# Altium PCB Flyback.PcbDoc
Units mil, origin at the board's own origin, x right, y up, seen from the top; angles counter-clockwise.
Board outline 7610 x 6110 mil, 2 copper layers (Top Layer, Bottom Layer); 216 components, 145 nets, 608 pads, 2 vias.
Unrouted connection lines stored in the file: 346.
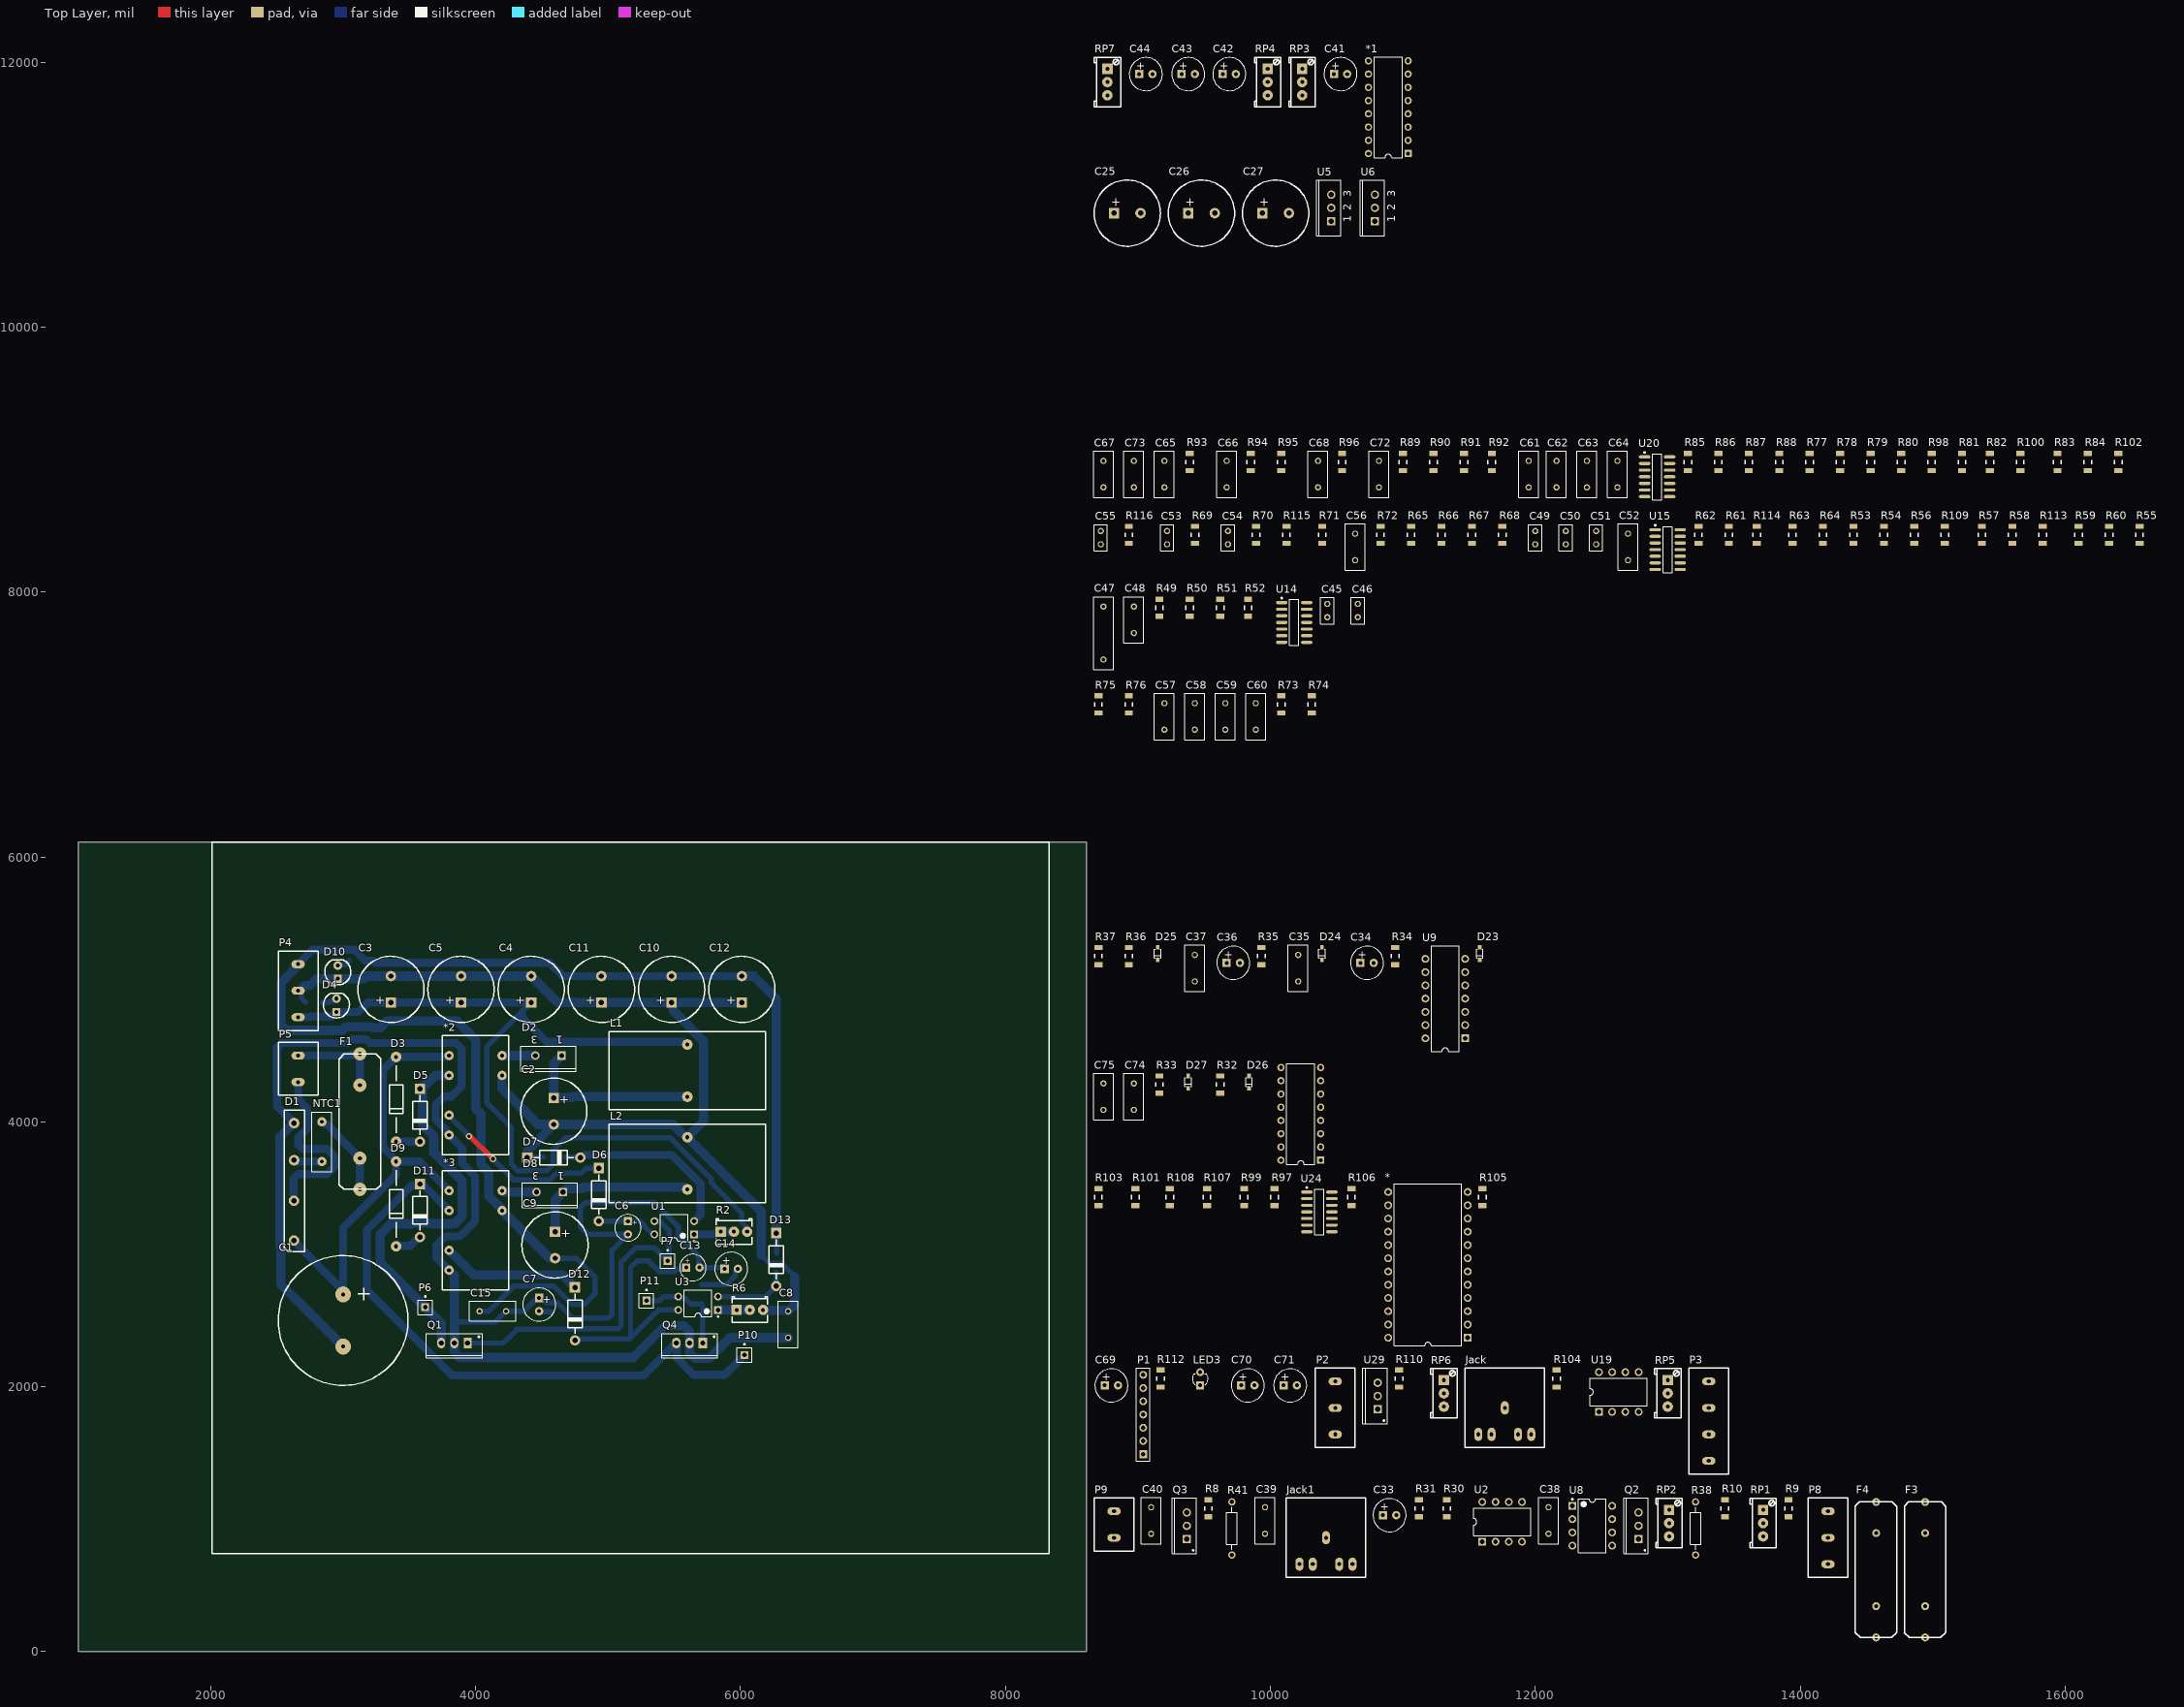
[diagram p0: Top Layer view]
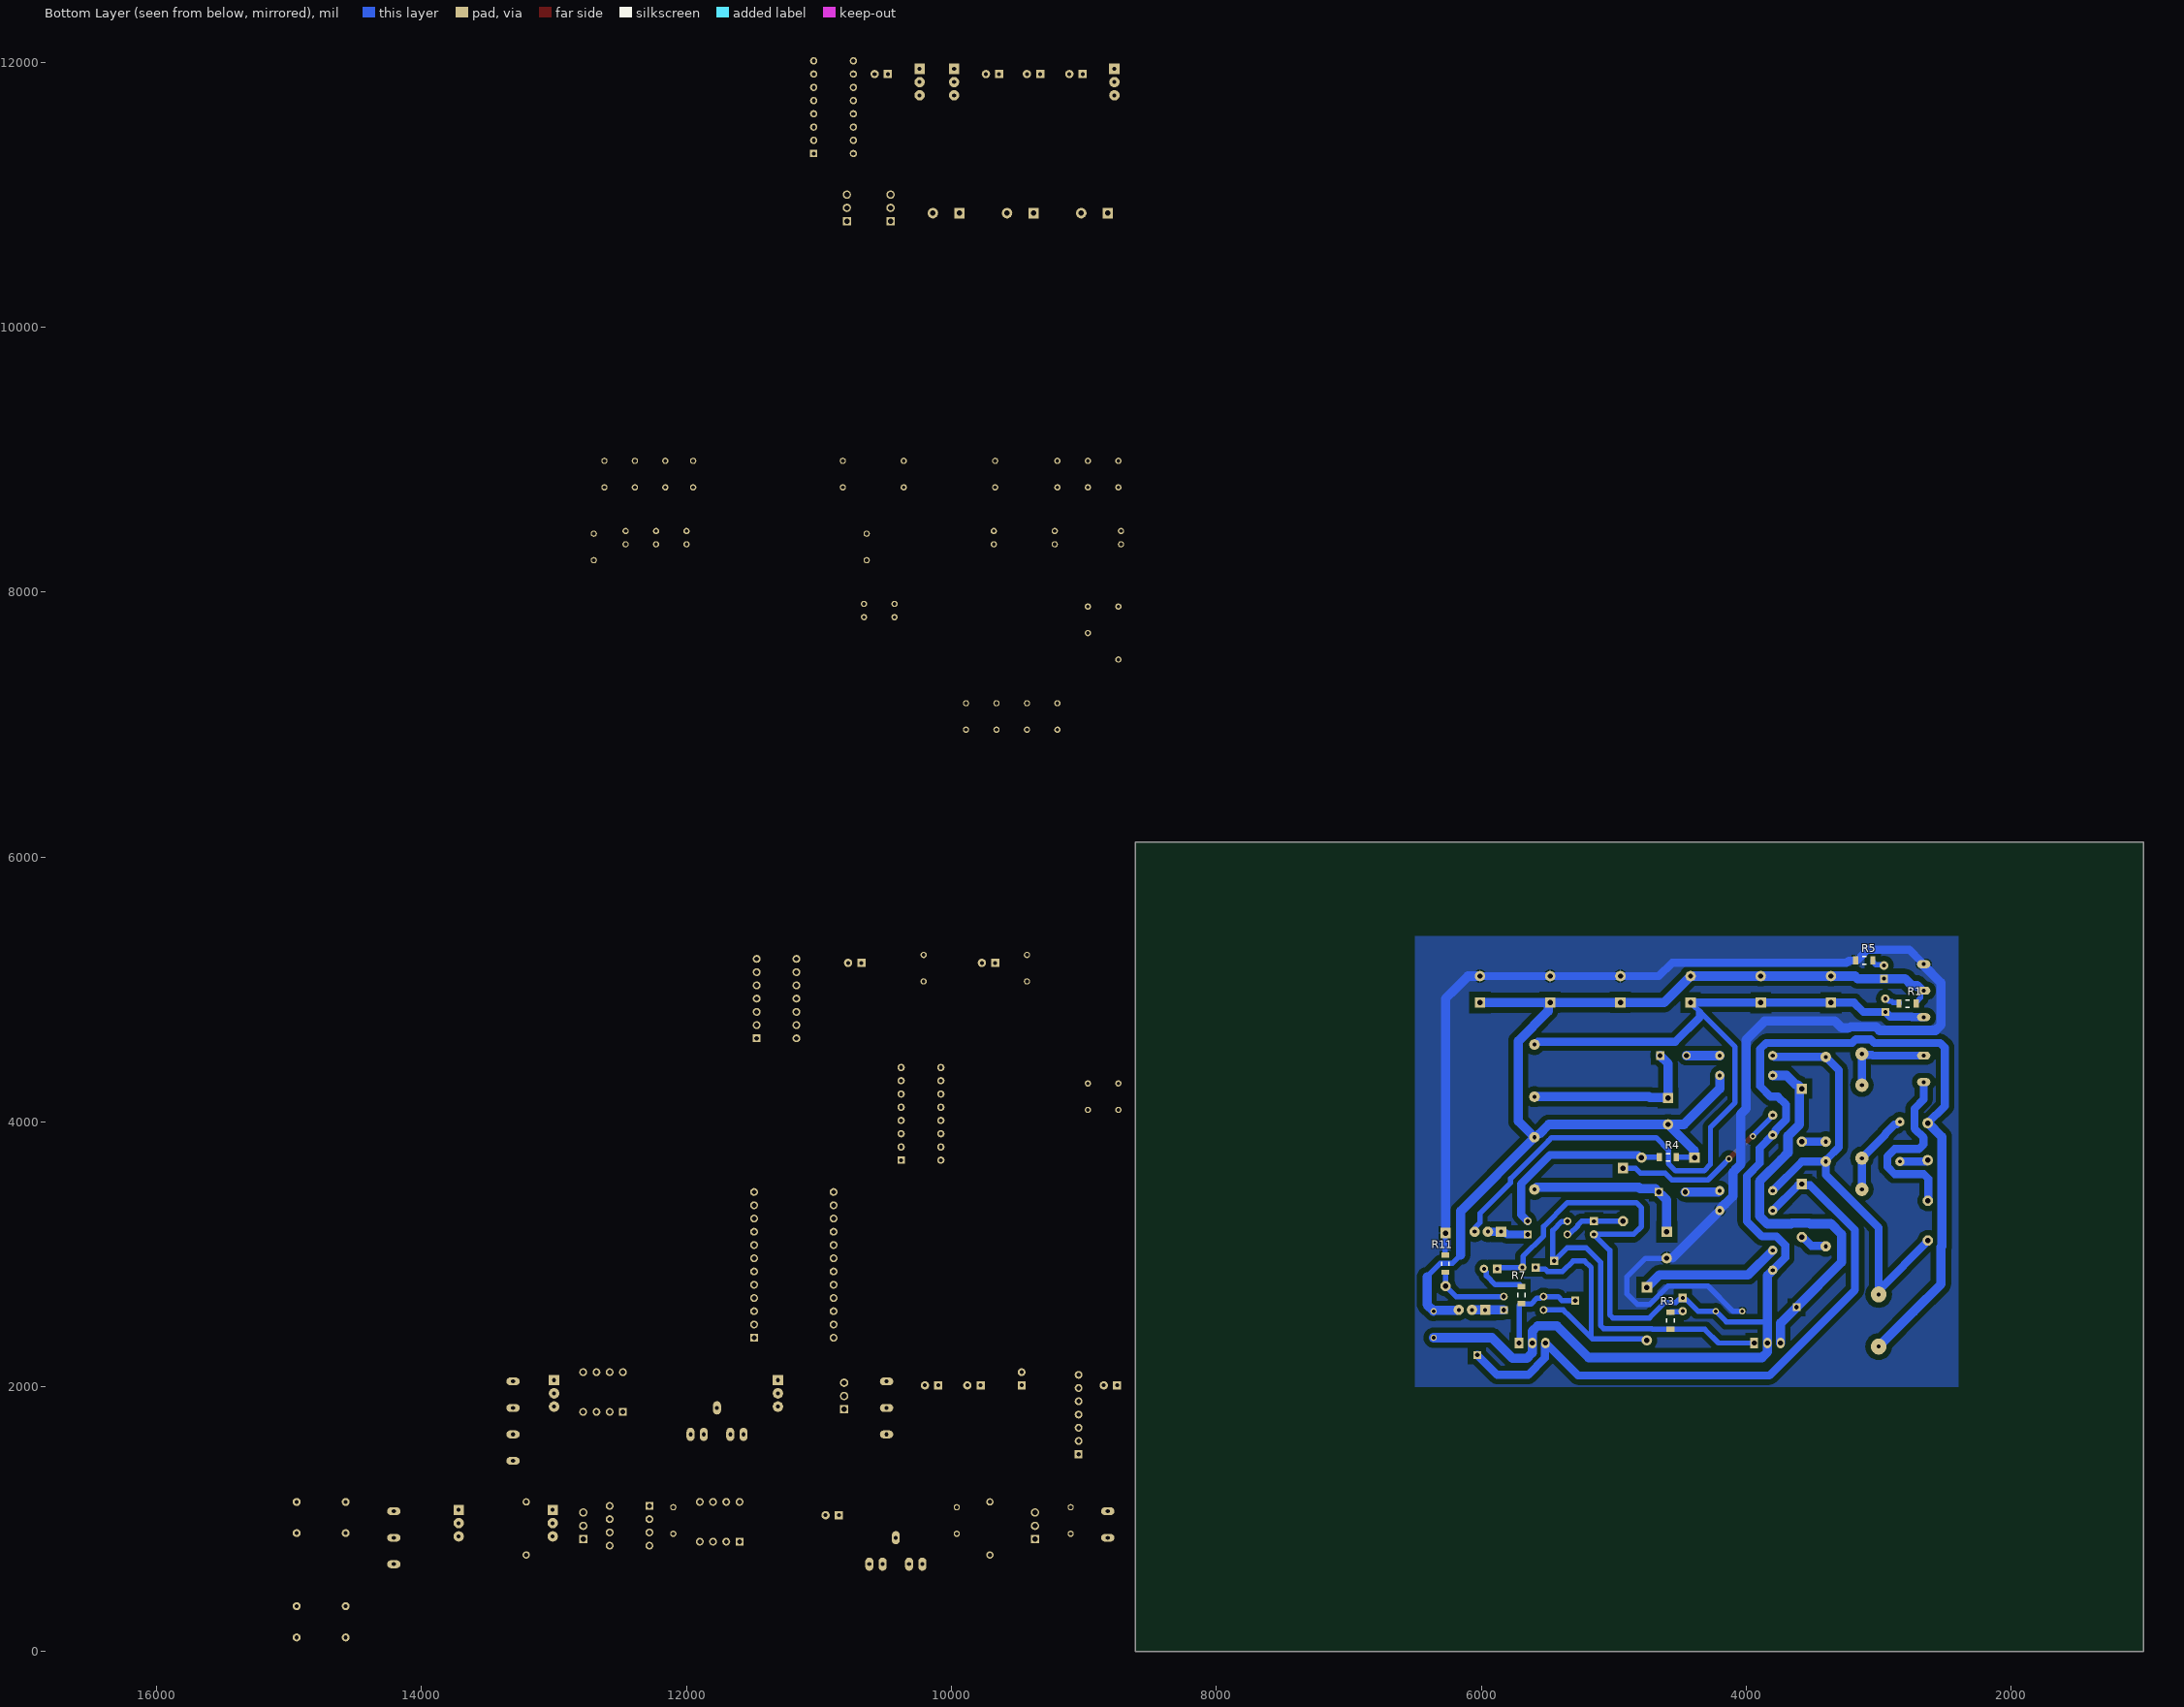
[diagram p1: Bottom Layer view, seen from below]

## Layer stack, top to bottom
Top Solder: solder mask 0.4, Solder Resist, Dk 3.5
Top Layer: signal copper 1.4
Dielectric 1: dielectric 12.6, FR-4, Dk 4.8
Bottom Layer: signal copper 1.4
Bottom Solder: solder mask 0.4, Solder Resist, Dk 3.5

## Board outline
1000,0 8610,0 8610,6110 1000,6110

## Design rules (kind name [scope] priority, off if disabled: settings)
Clearance [All] p1: gap=40 ignorepadtopadclearanceinfootprint=FALSE except(0: Arc-Hole Track-Hole SMDPad-Hole THPad-Hole Via-Hole Fill-Hole Poly-Hole Region-Hole Text-Hole; 10: Arc-Text Track-Text SMDPad-SMDPad SMDPad-THPad SMDPad-Via SMDPad-Text THPad-THPad THPad-Via THPad-Text Via-Via Via-Text Fill-Text Poly-Text Region-Text Text-Text; 20: Arc-SMDPad Track-SMDPad; 30: Arc-Arc Arc-Track Arc-THPad Arc-Via Track-Track Track-THPad Track-Via)
PolygonConnect [All] p1: connectstyle=Relief reliefconductorwidth=10 reliefentries=4 polygonreliefangle="90 Angle" airgapwidth=10
RoomDefinition Triangular [InComponentClass('Triangular')] p1: confinementstyle=ConfineIn formatcopy=TRUE lockcomponents=FALSE outline 8650,11270 11080,11270 11080,12150 8650,12150
RoomDefinition "Step Down" [InComponentClass('Step Down')] p2: confinementstyle=ConfineIn formatcopy=TRUE lockcomponents=FALSE outline 8650,10590 10960,10590 10960,11230 8650,11230
RoomDefinition "Pasa Banda Superior" [InComponentClass('Pasa Banda Superior')] p3: confinementstyle=ConfineIn formatcopy=TRUE lockcomponents=FALSE outline 8650,8670 16610,8670 16610,9180 8650,9180
RoomDefinition "Pasa Banda Inferior" [InComponentClass('Pasa Banda Inferior')] p4: confinementstyle=ConfineIn formatcopy=TRUE lockcomponents=FALSE outline 8660,8120 16720,8120 16720,8630 8660,8630
RoomDefinition "Pasa Bajos" [InComponentClass('Pasa Bajos')] p5: confinementstyle=ConfineIn formatcopy=TRUE lockcomponents=FALSE outline 8650,7400 10800,7400 10800,8080 8650,8080
RoomDefinition "Pasa Altos" [InComponentClass('Pasa Altos')] p6: confinementstyle=ConfineIn formatcopy=TRUE lockcomponents=FALSE outline 8660,6870 10470,6870 10470,7350 8660,7350
RoomDefinition "Mosfet Driver" [InComponentClass('Mosfet Driver')] p7: confinementstyle=ConfineIn formatcopy=TRUE lockcomponents=FALSE outline 8660,4520 11740,4520 11740,5450 8660,5450
RoomDefinition "Generador De Retardo" [InComponentClass('Generador De Retardo')] p8: confinementstyle=ConfineIn formatcopy=TRUE lockcomponents=FALSE outline 8650,3670 10420,3670 10420,4480 8650,4480
RoomDefinition Ganancia [InComponentClass('Ganancia')] p9: confinementstyle=ConfineIn formatcopy=TRUE lockcomponents=FALSE outline 8660,2300 11810,2300 11810,3630 8660,3630
RoomDefinition Filtros [InComponentClass('Filtros')] p10: confinementstyle=ConfineIn formatcopy=TRUE lockcomponents=FALSE outline 8660,1330 13470,1330 13470,2260 8660,2260
RoutingVias [All] p1: holewidth=28 width=50 viastyle="Through Hole" minholewidth=28 minwidth=50 maxholewidth=28 maxwidth=50
SolderMaskExpansion [All] p1: expansion=4 istentingtop=FALSE
Width [All] p1: maxlimit=90 minlimit=40 preferedwidth=60 minimp=50.000000 maximp=50.000000 favimp=50.000000
30 further rules are at their usual default settings.

## Classes and differential pairs
component class "Positive Pwr": *2 C2 C3 C4 C5 C6 C7 C8 D2 D3 D4 D5 D6 D7 L1 P6 P7 Q1 R1 R2 R3 R4 U1
component class "Negative Pwr": *3 C9 C10 C11 C12 C13 C14 C15 D8 D9 D10 D11 D12 D13 L2 P10 P11 Q4 R5 R6 R7 R11 U3
component class Triangular: *1 C41 C42 C43 C44 RP3 RP4 RP7
component class "Step Down": C25 C26 C27 U5 U6
component class "Pasa Banda Superior": C61 C62 C63 C64 C65 C66 C67 C68 C72 C73 R77 R78 R79 R80 R81 R82 R83 R84 R85 R86 R87 R88 R89 R90 R91 R92 R93 R94 R95 R96 R98 R100 R102 U20
component class "Pasa Banda Inferior": C49 C50 C51 C52 C53 C54 C55 C56 R53 R54 R55 R56 R57 R58 R59 R60 R61 R62 R63 R64 R65 R66 R67 R68 R69 R70 R71 R72 R109 R113 R114 R115 R116 U15
component class "Pasa Bajos": C45 C46 C47 C48 R49 R50 R51 R52 U14
component class "Pasa Altos": C57 C58 C59 C60 R73 R74 R75 R76
component class "Mosfet Driver": C34 C35 C36 C37 D23 D24 D25 R34 R35 R36 R37 U9
component class "Generador De Retardo": C74 C75 D26 D27 R32 R33
component class Ganancia: * R97 R99 R101 R103 R105 R106 R107 R108 U24
component class Fly-Back: C1 D1 F1 NTC1 P4 P5
component class Filtros: C69 C70 C71 Jack LED3 P1 P2 P3 R104 R110 R112 RP5 RP6 U19 U29
component class "Amplificador Clase D": C33 C38 C39 C40 F3 F4 Jack1 P8 P9 Q2 Q3 R8 R9 R10 R30 R31 R38 R41 RP1 RP2 U2 U7 U8

## Components (designator, comment, footprint, x,y, rotation, side; value= is the part's Value field where it differs from the comment)
* "AD5206" DIP-24/D31 11190,2920 r90 top
*1 "XR2206" PDIP16 10890,11660 r90 top
*2 "Transformador 3" "Transformador_flyback - duplicate" 4000,4300 r0 top
*3 "Transformador 3" "Transformador_flyback - duplicate" 4000,3280 r0 top
C1 "Cap Pol1" "cap rad 100mm" 3000,2500 r270 top value=220uF
C2 "Cap Pol1" "CAPR D500 H1200 R200 mil" 4590,4080 r270 top value=330uF
C3 "Cap Pol1" "CAPR D500 H1200 R200 mil" 3360,5000 r90 top value=330uF
C4 "Cap Pol1" "CAPR D500 H1200 R200 mil" 4420,5000 r90 top value=330uF
C5 "Cap Pol1" "CAPR D500 H1200 R200 mil" 3890,5000 r90 top value=330uF
C6 "Cap Pol1" "CAPR D200 H450 R100 mil" 5150,3200 r270 top value=2.2uF
C7 "Cap" "CAPR D250 H450 R100 mil" 4480,2620 r270 top value=47uF
C8 "Cap" RAD-0.2 6360,2470 r90 top value=1nF
C9 "Cap Pol1" "CAPR D500 H1200 R200 mil" 4600,3070 r270 top value=330uF
C10 "Cap Pol1" "CAPR D500 H1200 R200 mil" 5480,5000 r90 top value=330uF
C11 "Cap Pol1" "CAPR D500 H1200 R200 mil" 4950,5000 r90 top value=330uF
C12 "Cap Pol1" "CAPR D500 H1200 R200 mil" 6010,5000 r90 top value=330uF
C13 "Cap Pol1" "CAPR D200 H450 R100 mil" 5640,2900 r0 top value=2.2uF
C14 "Cap" "CAPR D250 H450 R100 mil" 5930,2890 r0 top value=47uF
C15 "Cap" RAD-0.2 4130,2570 r180 top value=1nF
C25 "Cap Pol1" "CAPR D500 H1400 R200 mil" 8920,10860 r0 top value=100uF
C26 "Cap Pol1" "CAPR D500 H1400 R200 mil" 9480,10860 r0 top value=3300uF
C27 "Cap Pol1" "CAPR D500 H1400 R200 mil" 10040,10860 r0 top value=220uF
C33 "Cap Pol1" "CAPR D250 H450 R100 mil" 10900,1030 r0 top value=10uF
C34 "Cap Pol1" "CAPR D250 H450 R100 mil" 10730,5200 r0 top value=10uF
C35 "Cap" RAD-0.2 10210,5160 r90 top value=0.1uF
C36 "Cap Pol1" "CAPR D250 H450 R100 mil" 9720,5200 r0 top value=10uF
C37 "Cap" RAD-0.2 9430,5160 r90 top value=0.1uF
C38 "Cap" RAD-0.2 12100,990 r90 top value=1nF
C39 "Cap" RAD-0.2 9960,990 r90 top value=470nF
C40 "Cap" RAD-0.2 9100,990 r90 top value=1nF
C41 "Cap" "CAPR D250 H450 R100 mil" 10530,11910 r0 top value=1uF
C42 "Cap Pol1" "CAPR D250 H450 R100 mil" 9690,11910 r0 top value=10uF
C43 "Cap" "CAPR D250 H450 R100 mil" 9380,11910 r0 top value=1uF
C44 "Cap" "CAPR D250 H450 R100 mil" 9060,11910 r0 top value=1uF
C45 "Cap" rad-0.1 10430,7860 r90 top value=68nF
C46 "Cap" rad-0.1 10660,7860 r90 top value=150nF
C47 "Cap" rad-0.4 8740,7690 r90 top value=56nF
C48 "Cap" rad-0.2 8970,7790 r90 top value=22nF
C49 "Cap" rad-0.1 12000,8410 r90 top value=68nF
C50 "Cap" rad-0.1 12230,8410 r90 top value=33nF
C51 "Cap" rad-0.1 12460,8410 r90 top value=150nF
C52 "Cap" rad-0.2 12700,8340 r90 top value=22nF
C53 "Cap" rad-0.1 9220,8410 r90 top value=68nF
C54 "Cap" rad-0.1 9680,8410 r90 top value=33nF
C55 "" rad-0.1 8720,8410 r90 top value=150nF
C56 "Cap" rad-0.2 10640,8340 r90 top value=22nF
C57 "Cap" rad-0.2 9200,7060 r90 top value=2.7nF
C58 "Cap" rad-0.2 9430,7060 r90 top value=2.7nF
C59 "Cap" rad-0.2 9660,7060 r90 top value=6.8nF
C60 "Cap" rad-0.2 9890,7060 r90 top value=6.8nF
C61 "Cap" rad-0.2 11950,8890 r90 top value=10nF
C62 "Cap" rad-0.2 12160,8890 r90 top value=4.7nF
C63 "Cap" rad-0.2 12390,8890 r90 top value=22nF
C64 "Cap" rad-0.2 12620,8890 r90 top value=3.3nF
C65 "Cap" rad-0.2 9200,8890 r90 top value=10nF
C66 "Cap" rad-0.2 9670,8890 r90 top value=4.7nF
C67 "Cap" rad-0.2 8740,8890 r90 top value=22nF
C68 "Cap" rad-0.2 10360,8890 r90 top value=3.3nF
C69 "Cap Pol1" "CAPR D250 H450 R100 mil" 8800,2010 r0 top value=10uF
C70 "Cap Pol1" "CAPR D250 H450 R100 mil" 9830,2010 r0 top value=10uF
C71 "Cap Pol1" "CAPR D250 H450 R100 mil" 10150,2010 r0 top value=10uF
C72 "Cap" rad-0.2 10820,8890 r90 top value=4.7nF
C73 "Cap" rad-0.2 8970,8890 r90 top value=4.7nF
C74 "Cap" RAD-0.2 8970,4190 r90 top value=0.1uF
C75 "Cap" RAD-0.2 8740,4190 r90 top value=0.1uF
D1 "RS405M" RS405M 2630,3550 r90 top
D2 "N1106" TO-220_A 4550,4500 r180 top
D3 "P6KE200" DO-15 3400,3850 r270 top
D4 "LED0" "Led 5mm ROJO" 2950,4880 r90 top
D5 "HER108" DO-41 3580,4050 r270 top
D6 "MUR160" DO-41 4930,3450 r270 top
D7 "Diodo Zener" DO-41 4590,3730 r0 top
D8 "N1106" TO-220_A 4560,3470 r180 top
D9 "P6KE200" DO-15 3400,3060 r270 top
D10 "LED0" "Led 5mm ROJO" 2960,5130 r90 top
D11 "HER108" DO-41 3580,3330 r270 top
D12 "MUR160" DO-41 4750,2550 r270 top
D13 "Diodo Zener" DO-41 6270,2960 r270 top
D23 "Diode 1N4148" SOD323-F 11580,5270 r90 top
D24 "Diode 1N4148" SOD323-F 10390,5270 r90 top
D25 "Diode 1N4148" SOD323-F 9150,5270 r90 top
D26 "Diode 1N4148" SOD323-F 9840,4300 r90 top
D27 "Diode 1N4148" SOD323-F 9380,4300 r90 top
F1 "Fuse 3A 250V" "FUSE 3A"#1 3120,4010 r270 top
F3 "Fuse 1" "FUSE 3A"#2 14950,610 r90 top
F4 "Fuse 1" "FUSE 3A"#2 14580,610 r90 top
Jack "Jack 3.5mm" "jack 3.5mm" 11570,1640 r0 top
Jack1 "Jack 3.5mm" "jack 3.5mm" 10220,660 r0 top
L1 "Inductor" "Bobina 1.5*3" 5610,4400 r90 top value=3.3uH
L2 "Inductor" "Bobina 1.5*3" 5610,3700 r90 top value=3.3uH
LED3 "Diodo Led" "Led 3mm AMARILLO" 9470,2060 r90 top
NTC1 "Termistor NTC" RAD-0.3 2840,3850 r90 top
P1 "Bluetooth audio" HDR1X7 9040,1490 r90 top
P2 "Header 3" "Bornera 3" 10490,1640 r90 top
P3 "Header 4" "Bornera 4" 13310,1440 r90 top
P4 "Header 3" "bornera 3" 2660,4790 r90 top
P5 "Header 2H" "bornera 2" 2660,4300 r90 top
P6 "Plug" PIN1 3620,2600 r0 top
P7 "Plug" PIN1 5450,2950 r0 top
P8 "Header 3" "bornera 3" 14210,660 r90 top
P9 "Header 2H" "bornera 2" 8820,860 r90 top
P10 "Plug" PIN1 6030,2240 r0 top
P11 "Plug" PIN1 5290,2650 r0 top
Q1 "TOP227YN" TO-220AB#1 3840,2330 r180 top
Q2 "IRFZ24N" TO-220AB#2 12780,950 r90 top
Q3 "IRFZ24N" TO-220AB#2 9370,950 r90 top
Q4 "TOP227YN" TO-220AB#3 5615.05,2330 r180 top
R1 "Res2" "1206 resistor" 2780,4890 r0 bottom value=1K
R2 "Trimpot" "Trimpot Horizontal" 5950,3170 r0 top
R3 "Res2" "1206 resistor" 4570,2500 r270 bottom value=6.8
R4 "Res1" "1206 resistor" 4590,3730 r0 bottom value=22K
R5 "Res2" "1206 resistor" 3110,5220 r180 bottom value=1K
R6 "Trimpot" "Trimpot Horizontal" 6070,2580 r0 top
R7 "Res2" "1206 resistor" 5695.49,2693.5 r270 bottom value=6.8
R8 "Res2" "1206 resistor" 9530,1080 r90 top value=1K
R9 "Res2" "1206 resistor" 13910,1080 r90 top value=20K
R10 "Res2" "1206 resistor" 13430,1080 r90 top value=13K
R11 "Res1" "1206 resistor" 6270,2930 r270 bottom value=22K
R30 "Res2" "1206 resistor" 11330,1080 r90 top value=1K
R31 "Res2" "1206 resistor" 11120,1080 r90 top value=1K
R32 "Res2" "1206 resistor" 9620,4280 r90 top value=6.8K
R33 "Res2" "1206 resistor" 9160,4280 r90 top value=6.8K
R34 "Res2" "1206 resistor" 10940,5250 r90 top value=1K
R35 "Res2" "1206 resistor" 9930,5250 r90 top value=1K
R36 "Res2" "1206 resistor" 8930,5250 r90 top value=1K
R37 "Res2" "1206 resistor" 8700,5250 r90 top value=1K
R38 "Res2" AXIAL-0.4 13210,930 r90 top value=39
R41 "Res2" AXIAL-0.4 9710,930 r90 top value=39
R49 "Res2" "1206 resistor" 9160,7880 r90 top value=10K
R50 "Res2" "1206 resistor" 9390,7880 r90 top value=10K
R51 "Res2" "1206 resistor" 9620,7880 r90 top value=10K
R52 "Res2" "1206 resistor" 9830,7880 r90 top value=10K
R53 "Res2" "1206 resistor" 14400,8430 r90 top value=10K
R54 "Res2" "1206 resistor" 14630,8430 r90 top value=10K
R55 "Res2" "1206 resistor" 16560,8430 r90 top value=10K
R56 "Res2" "1206 resistor" 14860,8430 r90 top value=10K
R57 "Res2" "1206 resistor" 15370,8430 r90 top value=10K
R58 "Res2" "1206 resistor" 15600,8430 r90 top value=10K
R59 "Res2" "1206 resistor" 16100,8430 r90 top value=10K
R60 "Res2" "1206 resistor" 16330,8430 r90 top value=22K
R61 "Res2" "1206 resistor" 13460,8430 r90 top value=5.2K
R62 "Res2" "1206 resistor" 13230,8430 r90 top value=5.6K
R63 "Res2" "1206 resistor" 13940,8430 r90 top value=2.7K
R64 "Res2" "1206 resistor" 14170,8430 r90 top value=8.2K
R65 "Res2" "1206 resistor" 11060,8430 r90 top value=10K
R66 "Res2" "1206 resistor" 11290,8430 r90 top value=10K
R67 "Res2" "1206 resistor" 11520,8430 r90 top value=10K
R68 "Res2" "1206 resistor" 11750,8430 r90 top value=10K
R69 "Res2" "1206 resistor" 9430,8430 r90 top value=6.8K
R70 "Res2" "1206 resistor" 9890,8430 r90 top value=15K
R71 "" "1206 resistor" 10390,8430 r90 top value=8.2K
R72 "Res2" "1206 resistor" 10830,8430 r90 top value=8.2K
R73 "Res2" "1206 resistor" 10080,7150 r90 top value=8.2K
R74 "Res2" "1206 resistor" 10310,7150 r90 top value=1.5K
R75 "Res2" "1206 resistor" 8700,7150 r90 top value=10K
R76 "Res2" "1206 resistor" 8930,7150 r90 top value=10K
R77 "Res2" "1206 resistor" 14070,8980 r90 top value=10K
R78 "Res2" "1206 resistor" 14300,8980 r90 top value=10K
R79 "Res2" "1206 resistor" 14530,8980 r90 top value=10K
R80 "Res2" "1206 resistor" 14760,8980 r90 top value=10K
R81 "Res2" "1206 resistor" 15220,8980 r90 top value=10K
R82 "Res2" "1206 resistor" 15430,8980 r90 top value=10K
R83 "Res2" "1206 resistor" 15940,8980 r90 top value=10K
R84 "Res2" "1206 resistor" 16170,8980 r90 top value=22K
R85 "Res2" "1206 resistor" 13150,8980 r90 top value=7.5K
R86 "Res2" "1206 resistor" 13380,8980 r90 top value=10K
R87 "Res2" "1206 resistor" 13610,8980 r90 top value=3.1K
R88 "Res2" "1206 resistor" 13840,8980 r90 top value=11.59K
R89 "Res2" "1206 resistor" 11000,8980 r90 top value=10K
R90 "Res2" "1206 resistor" 11230,8980 r90 top value=10K
R91 "Res2" "1206 resistor" 11460,8980 r90 top value=10K
R92 "Res2" "1206 resistor" 11670,8980 r90 top value=10K
R93 "Res2" "1206 resistor" 9390,8980 r90 top value=8.2K
R94 "Res2" "1206 resistor" 9850,8980 r90 top value=10K
R95 "Res2" "1206 resistor" 10080,8980 r90 top value=4.7K
R96 "Res2" "1206 resistor" 10540,8980 r90 top value=10K
R97 "Res2" "1206 resistor" 10030,3430 r90 top value=10K
R98 "Res2" "1206 resistor" 14990,8980 r90 top value=2.7K
R99 "Res2" "1206 resistor" 9800,3430 r90 top value=10K
R100 "Res2" "1206 resistor" 15660,8980 r90 top value=1.5K
R101 "Res2" "1206 resistor" 8980,3430 r90 top value=10K
R102 "Res2" "1206 resistor" 16400,8980 r90 top value=4.7K
R103 "Res2" "1206 resistor" 8700,3430 r90 top value=10K
R104 "Res2" "1206 resistor" 12160,2060 r90 top value=10K
R105 "Res2" "1206 resistor" 11600,3430 r90 top value=3.3K
R106 "Res2" "1206 resistor" 10610,3430 r90 top value=10K
R107 "Res2" "1206 resistor" 9520,3430 r90 top value=3.3K
R108 "Res2" "1206 resistor" 9240,3430 r90 top value=10K
R109 "Res2" "1206 resistor" 15090,8430 r90 top value=1K
R110 "Res2" "1206 resistor" 10970,2060 r90 top value=10K
R112 "1K" "1206 resistor" 9170,2060 r90 top
R113 "Res2" "1206 resistor" 15830,8430 r90 top value=1K
R114 "Res2" "1206 resistor" 13670,8430 r90 top value=1K
R115 "Res2" "1206 resistor" 10120,8430 r90 top value=15K
R116 "" "1206 resistor" 8930,8430 r90 top value=8.2K
RP1 "Trimpot" "Trimpot Multivuelta Vertical" 13720,970 r90 top
RP2 "Trimpot" "Trimpot Multivuelta Vertical" 13010,970 r90 top
RP3 "Trimpot" "Trimpot Multivuelta Vertical" 10240,11850 r90 top
RP4 "Trimpot" "Trimpot Multivuelta Vertical" 9980,11850 r90 top
RP5 "Trimpot" "Trimpot Multivuelta Vertical" 13000,1950 r90 top
RP6 "Trimpot" "Trimpot Multivuelta Vertical" 11310,1950 r90 top
RP7 "Trimpot" "Trimpot Multivuelta Vertical" 8770,11850 r90 top
U1 "4N25" DIP-4 5500,3200 r180 top
U2 "TL082ACJG" 693-02 11750,980 r0 top
U3 "4N25" DIP-4 5680,2630 r180 top
U5 "LM7824" TO-220_B 10460,10900 r90 top
U6 "LM7812" TO-220_B 10790,10900 r90 top
U8 "LM318N" DIP-8 12430,950 r0 top
U9 "IR2110" PDIP14 11320,4930 r90 top
U14 "TL084ACD" 751A-02_N 10180,7770 r0 top
U15 "TL084ACD" 751A-02_N 13000,8320 r0 top
U19 "TL082ACJG" 693-02 12630,1960 r0 top
U20 "TL084ACD" 751A-02_N 12920,8870 r0 top
U24 "TL084ACD" 751A-02_N 10370,3320 r0 top
U29 "LM78M05CT/NOPB" T03B 10810,1930 r90 top
? "CD4049" PDIP16 10230,4060 r90 top

## Footprints (in the part's own frame and the unit in brackets; to place one, negate y for a bottom-side part, rotate by r counter-clockwise, add the part's x,y. Pads: shape width x height; smd on the part's side, far side on the other; paste and mask are expansions set on the pad)
693-02 [mm] "DIP; 8 Leads; Row Spacing 7.62 mm; Pitch 2.54 mm"
  rect 1.5x1.5 hole 0.9: 1(-3.81,-3.81)
  round 1.5 hole 0.9: 2(-1.27,-3.81) 3(1.27,-3.81) 4(3.81,-3.81) 5(3.81,3.81) 6(1.27,3.81) 7(-1.27,3.81) 8(-3.81,3.81)
  silkscreen extent -5.5,-2.65 5.5,2.65
751A-02_N [mm] "SOIC, 14-Leads, Body 8.7x3.9mm, Pitch 1.27mm, IPC Medium Density"
  oval 2.2x0.6 smd: 1(-2.4,3.81) 2(-2.4,2.54) 3(-2.4,1.27) 4(-2.4,0) 5(-2.4,-1.27) 6(-2.4,-2.54) 7(-2.4,-3.81) 8(2.4,-3.81) 9(2.4,-2.54) 10(2.4,-1.27) 11(2.4,0) 12(2.4,1.27) 13(2.4,2.54) 14(2.4,3.81)
  silkscreen extent -2.52,-4.4 0.9,4.78, body extent -1.95,-4.33 1.95,4.33, height 1.75
"1206 resistor" [mil]
  rect 39x61 smd: 1(-63,-2) 2(66,-2)
  silkscreen extent -14,-30 16,27
AXIAL-0.4 [mm] "Axial Device, Thru-Hole; 2 Leads; 0.4 in Pin Spacing"
  round 1.4 hole 0.85: 1(-5.08,0) 2(5.08,0)
  silkscreen extent -4.06,-1.02 4.06,1.02
"Bobina 1.5*3" [mil]
  round 80 hole 30: 1(-210.7,11) 2(183,11)
  silkscreen extent -309,-580 281,602
"bornera 2" [mil]
  oval 60x100 hole 30: 1(0,0) 2(200,0)
  silkscreen extent -100,-150 300,150
"Bornera 3" [mil]
  oval 60x100 hole 30: 1(0,0) 2(200,0) 3(400,0)
  silkscreen extent -100,-150 500,150
"bornera 3" [mil]
  oval 60x100 hole 30: 1(0,0) 2(200,0) 3(400,0)
  silkscreen extent -100,-150 500,150
"Bornera 4" [mil]
  oval 60x100 hole 30: 1(0,0) 2(200,0) 3(400,0) 4(600,0)
  silkscreen extent -100,-150 700,150
"cap rad 100mm" [mil]
  round 120 hole 30: 1(-196.85,0) 2(196.85,0)
  silkscreen extent -490,-490 490,490
"CAPR D200 H450 R100 mil" [mm]
  rect 1.6x1.6 hole 0.75: 1(-1.27,0)
  round 1.6 hole 0.75: 2(1.27,0)
  silkscreen extent -2.54,-2.54 2.54,2.54, body extent -2.75,-2.74 2.73,2.74, height 2.62
"CAPR D250 H450 R100 mil" [mm]
  rect 1.6x1.6 hole 0.75: 1(-1.27,0)
  round 1.6 hole 0.75: 2(1.27,0)
  silkscreen extent -3.17,-3.17 3.17,3.17, body extent -3.4,-3.39 3.37,3.39, height 2.49
"CAPR D500 H1200 R200 mil" [mm]
  rect 2x2 hole 1: 1(-2.54,0)
  round 2 hole 1: 2(2.54,0)
  silkscreen extent -6.35,-6.35 6.35,6.35, body extent -6.5,-6.48 6.44,6.48, height 2.49
"CAPR D500 H1400 R200 mil" [mm]
  rect 2x2 hole 1: 1(-2.54,0)
  round 2 hole 1: 2(2.54,0)
  silkscreen extent -6.35,-6.35 6.35,6.35, body extent -6.5,-6.48 6.44,6.48, height 2.49
DIP-4 [mm] "DIP; 4 Leads; Row Spacing 7.62 mm; Pitch 2.54 mm"
  rect 1.5x1.5 hole 0.9: 1(-3.81,1.27)
  round 1.5 hole 0.9: 2(-3.81,-1.27) 3(3.81,-1.27) 4(3.81,1.27)
  silkscreen extent -3.94,-2.55 2.65,2.69, body extent -3.15,-2.5 3.15,2.5, height 5.6
DIP-8 [mm] "DIP; 8 Leads; Row Spacing 7.62 mm; Pitch 2.54 mm"
  rect 1.5x1.5 hole 0.9: 1(-3.81,3.81)
  round 1.5 hole 0.9: 2(-3.81,1.27) 3(-3.81,-1.27) 4(-3.81,-3.81) 5(3.81,-3.81) 6(3.81,-1.27) 7(3.81,1.27) 8(3.81,3.81)
  silkscreen extent -3.93,-5.15 2.65,5.23, body extent -3.6,-5.15 3.6,5.15, height 5.08
DIP-24/D31 [mm]
  rect 1.5x1.5 hole 0.9: 1(-13.97,-7.62)
  round 1.5 hole 0.9: 2(-11.43,-7.62) 3(-8.89,-7.62) 4(-6.35,-7.62) 5(-3.81,-7.62) 6(-1.27,-7.62) 7(1.27,-7.62) 8(3.81,-7.62) 9(6.35,-7.62) 10(8.89,-7.62) 11(11.43,-7.62) 12(13.97,-7.62) 13(13.97,7.62) 14(11.43,7.62) 15(8.89,7.62) 16(6.35,7.62) 17(3.81,7.62) 18(1.27,7.62) 19(-1.27,7.62) 20(-3.81,7.62) 21(-6.35,7.62) 22(-8.89,7.62) 23(-11.43,7.62) 24(-13.97,7.62)
  silkscreen extent -15.5,-6.45 15.5,6.45
DO-15 [mil]
  round 80 hole 30: 1(-640,0) 2(0,0)
  silkscreen extent -573,-49 -67,51
DO-41 [mm] "Diode, Axial; Body 5.2 x 2.7 mm (LxDia. max), Lead Dia. 0.86 mm (max)"
  rect 2x2 hole 1: 1(-5.08,0)
  round 2 hole 1: 2(5.08,0)
  silkscreen extent -3.81,-1.4 3.81,1.4, body extent -5.54,-1.37 5.49,1.35, height 2.72
"FUSE 3A"#1 [mil]
  round 100 hole 30: 1(-502.88,6.6) 1(-266.68,6.6) 2(284.53,6.6) 2(520.03,6.6)
  silkscreen extent -503,-151 520,164
"FUSE 3A"#2 [mil]
  round 60 hole 30: 1(-502.88,6.6) 1(-266.68,6.6) 2(284.52,6.6) 2(520.03,6.6)
  silkscreen extent -503,-151 520,164
HDR1X7 [mm] "Connector; Header; 7 Position"
  rect 1.5x1.5 hole 0.9: 1(0,0)
  round 1.5 hole 0.9: 2(2.54,0) 3(5.08,0) 4(7.62,0) 5(10.16,0) 6(12.7,0) 7(15.24,0)
  silkscreen extent -1.27,-1.27 16.51,1.27
"jack 3.5mm" [mil]
  oval 60x100 hole 30: 1(0,0) 1(100,0) 2(300,0) 2(400,0) 3(200,200)
  Top Layer region: 400,400
  silkscreen extent -100,-100 500,500
"Led 3mm AMARILLO" [mm]
  rect 1.5x1.5 hole 0.75: 1(-1.27,0)
  round 1.5 hole 0.75: 2(1.27,0)
  silkscreen extent -1.18,-1.5 1,1.5, body extent -1.65,-1.65 1.65,1.64, height 5.51
"Led 5mm ROJO" [mil]
  rect 59.06x59.06 hole 29.53: 1(-50,0)
  round 65 hole 30: 2(50,0)
  silkscreen extent -96,-98 92,99, body extent -117,-118 96,119, height 493
PDIP14 [mm] "DIP; 14 Leads; Row Spacing 7.62 mm; Pitch 2.54 mm"
  rect 1.5x1.5 hole 0.9: 1(-7.62,-3.81)
  round 1.5 hole 0.9: 2(-5.08,-3.81) 3(-2.54,-3.81) 4(0,-3.81) 5(2.54,-3.81) 6(5.08,-3.81) 7(7.62,-3.81) 8(7.62,3.81) 9(5.08,3.81) 10(2.54,3.81) 11(0,3.81) 12(-2.54,3.81) 13(-5.08,3.81) 14(-7.62,3.81)
  silkscreen extent -10.1,-2.65 10.1,2.65
PDIP16 [mm] "DIP; 16 Leads; Row Spacing 7.62 mm; Pitch 2.54 mm"
  rect 1.4x1.4 hole 0.8: 1(-8.89,-3.81)
  round 1.4 hole 0.8: 2(-6.35,-3.81) 3(-3.81,-3.81) 4(-1.27,-3.81) 5(1.27,-3.81) 6(3.81,-3.81) 7(6.35,-3.81) 8(8.89,-3.81) 9(8.89,3.81) 10(6.35,3.81) 11(3.81,3.81) 12(1.27,3.81) 13(-1.27,3.81) 14(-3.81,3.81) 15(-6.35,3.81) 16(-8.89,3.81)
  silkscreen extent -9.65,-2.7 9.65,2.7
PIN1 [mm] "Connector; Plug"
  rect 1.5x1.5 hole 0.9: 1(0,0)
  silkscreen extent -1.4,-1.4 1.4,2.17
rad-0.1 [mm] "Radial Cap, Thru-Hole; 2 Leads; 0.1 in Pin Spacing"
  round 1.2 hole 0.7: 1(-1.27,0) 2(1.27,0)
  silkscreen extent -2.54,-1.27 2.54,1.27
RAD-0.2 [mm] "Radial Cap, Thru-Hole; 2 Leads; 0.2 in Pin Spacing"
  round 1.2 hole 0.7: 1(-2.54,0) 2(2.54,0)
  silkscreen extent -4.44,-1.91 4.44,1.91
rad-0.2 [mm] "Radial Cap, Thru-Hole; 2 Leads; 0.2 in Pin Spacing"
  round 1.2 hole 0.7: 1(-2.54,0) 2(2.54,0)
  silkscreen extent -4.44,-1.91 4.44,1.91
RAD-0.3 [mil] "Radial Cap, Thru-Hole; 2 Leads; 0.3 in Pin Spacing"
  round 70 hole 27.56: 1(-150,0) 2(150,0)
  silkscreen extent -225,-75 225,75
rad-0.4 [mm] "Radial Cap, Thru-Hole; 2 Leads; 0.4 in Pin Spacing"
  round 1.2 hole 0.7: 1(-5.08,0) 2(5.08,0)
  silkscreen extent -6.98,-1.91 6.98,1.91
RS405M [mil]
  round 80 hole 40: 1(-446,1) 2(-146,1) 3(440,0) 4(160,0)
  silkscreen extent -531,-79 539,76
SOD323-F [mm]
  rect 0.9x0.7 smd: 1(1.2,0) 2(-1.2,0)
  silkscreen extent -0.85,-0.63 0.85,0.62, body extent -1.15,-0.6 1.15,0.6, height 1.07
T03B [mm] "TO, Thru-Hole, Vertical, Heatsink Mounted; 3 In-Line Leads; Pitch 2.54 mm"
  rect 1.6x1.6 hole 1: 1(-2.54,0)
  round 1.6 hole 1: 2(0,0) 3(2.54,0)
  silkscreen extent -5.35,-1.85 5.35,2.85, body extent -5.4,-1.9 5.4,2.9, height 19.4
TO-220_A [mm] "TO, Thru-Hole, Vertical, Heatsink Mounted; 3 In-Line Leads (1 Absent); Pitch 2.54 mm"
  rect 1.6x1.6 hole 1: 1(-2.54,0)
  round 1.6 hole 1: 3(2.54,0)
  silkscreen extent -5.3,-1.8 5.3,3
TO-220_B [mm] "TO, Thru-Hole, Vertical, Heatsink Mounted; 3 In-Line Leads; Pitch 2.54 mm"
  rect 1.6x1.6 hole 1: 1(-2.54,0)
  round 1.6 hole 1: 2(0,0) 3(2.54,0)
  silkscreen extent -5.35,-1.85 5.35,2.85
TO-220AB#1 [mil] "TO, Thru-Hole, Vertical, Heatsink Mounted; 3 In-Line Leads; Pitch 2.54 mm"
  rect 60x80 hole 39.37: 1(-100,0)
  oval 60x80 hole 39.37: 2(0,0) 3(100,0)
  silkscreen extent -211,-73 211,112, body extent -213,-75 213,114, height 760
TO-220AB#2 [mil] "TO, Thru-Hole, Vertical, Heatsink Mounted; 3 In-Line Leads; Pitch 2.54 mm"
  rect 62.99x62.99 hole 39.37: 1(-100,0)
  round 62.99 hole 39.37: 2(0,0) 3(100,0)
  silkscreen extent -211,-73 211,112, body extent -213,-75 213,114, height 760
TO-220AB#3 [mil] "TO, Thru-Hole, Vertical, Heatsink Mounted; 3 In-Line Leads; Pitch 2.54 mm"
  rect 62.99x80 hole 39.37: 1(-100,0)
  oval 62.99x80 hole 39.37: 2(0,0) 3(100,0)
  silkscreen extent -211,-73 211,112, body extent -213,-75 213,114, height 760
"Transformador_flyback - duplicate" [mil]
  round 70 hole 30: 1(-200,200) 2(-200,50) 3(-200,-400) 4(-200,-250) 5(200,50) 6(200,200)
  silkscreen extent -250,-550 250,350
"Trimpot Horizontal" [mm] "Preset Multivuelta de ajuste vertical"
  rect 2x2 hole 0.75: 1(-2.54,0)
  round 2 hole 0.75: 2(2.54,0) 3(0,0)
  silkscreen extent -3.43,-2.41 3.43,2.54, body extent -3.3,-2.29 3.3,2.41, height 7.1
"Trimpot Multivuelta Vertical" [mm] "Preset Multivuelta de ajuste vertical"
  rect 2x2 hole 0.75: 1(2.54,0)
  round 2 hole 0.75: 2(-2.54,0) 3(0,0)
  silkscreen extent -4.75,-2.54 4.75,2.54, body extent -4.6,-2.41 4.6,2.39, height 12.06

## Part data
C1 C2 C3 C4 C5 C6 C9 C10 C11 C12 C13 C25 C26 C27 C33 C34 C36 C42 C69 C70 C71: "Polarized Capacitor (Radial)", LatestRevisionDate=17-Jul-2002, LatestRevisionNote="Re-released for DXP Platform.", PackageDescription="Polarized Capacitor (Radial); 2 Leads", PackageReference=RB7.6-15, Published=8-Jun-2000, Publisher="Altium Limited"
C7 C8 C14 C15 C35 C37 C38 C39 C40 C41 C43 C44 C45 C46 C47 C48 C49 C50 C51 C52 C53 C54 C56 C57 C58 C59 C60 C61 C62 C63 C64 C65 C66 C67 C68 C72 C73 C74 C75: "Capacitor", LatestRevisionDate=17-Jul-2002, LatestRevisionNote="Re-released for DXP Platform.", PackageDescription="Radial Cap, Thru-Hole; 2 Leads; 0.3 in Pin Spacing", PackageReference=RAD-0.3, Published=8-Jun-2000, Publisher="Altium Limited"
C55: library part Cap, "Capacitor", LatestRevisionDate=17-Jul-2002, LatestRevisionNote="Re-released for DXP Platform.", PackageDescription="Radial Cap, Thru-Hole; 2 Leads; 0.3 in Pin Spacing", PackageReference=RAD-0.3, Published=8-Jun-2000, Publisher="Altium Limited"
D1: library part Bridge1, "Full Wave Diode Bridge", DatasheetVersion=E2732B, LatestRevisionDate=29-May-2009, LatestRevisionNote="Sch pins A & K swapped.", PackageDescription="Bridge Rectifier; 4 Terminals; Body 9.4 x 9.4 mm (typ); Pitch 5.08 mm", PackageReference=D-38, Published=8-Jun-2000, Publisher="Altium Limited"
D2 D3 D5 D6 D8 D9 D11 D12: library part "Diode 1N4148", "High Conductance Fast Diode", Code_JEDEC=DO-204-AH, ComponentLink1Description="Manufacturer Link", ComponentLink1URL=http://www.fairchildsemi.com/, ComponentLink2Description=Datasheet, ComponentLink2URL=http://www.fairchildsemi.com/ds/1N%2F1N4148.pdf, DatasheetVersion=1997, LatestRevisionDate=17-Jul-2002, LatestRevisionNote="Re-released for DXP Platform.", PackageDescription="Diode, Axial; Body 3.8 x 1.9 mm (LxDia. max), Lead Dia. 0.53 mm (max)", PackageReference=DO-35, Published=8-Jun-2000, Publisher="Altium Limited"
D4 D10: "Typical INFRARED GaAs LED", LatestRevisionDate=08-Jul-2005, LatestRevisionNote="Mech Layer 1 removed.", PackageDescription="LED; 2 Leads", PackageReference=LED-0, Published=8-Jun-2000, Publisher="Altium Limited"
D23 D24 D25 D26 D27: "High Conductance Fast Diode", Code_JEDEC=DO-204-AH, ComponentLink1Description="Manufacturer Link", ComponentLink1URL=http://www.fairchildsemi.com/, ComponentLink2Description=Datasheet, ComponentLink2URL=http://www.fairchildsemi.com/ds/1N%2F1N4148.pdf, DatasheetVersion=1997, LatestRevisionDate=17-Jul-2002, LatestRevisionNote="Re-released for DXP Platform.", PackageDescription="Diode, Axial; Body 3.8 x 1.9 mm (LxDia. max), Lead Dia. 0.53 mm (max)", PackageReference=DO-35, Published=8-Jun-2000, Publisher="Altium Limited"
F1: library part "Fuse 1", "Fuse", LatestRevisionDate=17-Jul-2002, LatestRevisionNote="Re-released for DXP Platform.", PackageDescription="Thru-Hole; 2 Leads", PackageReference=PIN-W2/E2.8, Published=8-Jun-2000, Publisher="Altium Limited"
F3 F4: "Fuse", LatestRevisionDate=17-Jul-2002, LatestRevisionNote="Re-released for DXP Platform.", PackageDescription="Thru-Hole; 2 Leads", PackageReference=PIN-W2/E2.8, Published=8-Jun-2000, Publisher="Altium Limited"
LED3: "Led 3mm", VALOR="Led Xmm (COLOR)"
NTC1: "Termistor NTC SMD", VALOR=100
P1: library part "Header 7", "Header, 7-Pin", LatestRevisionDate=17-Jul-2002, LatestRevisionNote="Re-released for DXP Platform.", Publisher="Altium Limited"
P2 P4 P8: "Header, 3-Pin", LatestRevisionDate=17-Jul-2002, LatestRevisionNote="Re-released for DXP Platform.", Publisher="Altium Limited"
P3: "Header, 4-Pin", LatestRevisionDate=17-Jul-2002, LatestRevisionNote="Re-released for DXP Platform.", Publisher="Altium Limited"
P5 P9: "Header, 2-Pin, Right Angle", LatestRevisionDate=17-Jul-2002, LatestRevisionNote="Re-released for DXP Platform.", Publisher="Altium Limited"
Q1 Q4: library part MOSFET-N, "N-Channel MOSFET", LatestRevisionDate=17-Jul-2002, LatestRevisionNote="Re-released for DXP Platform.", PackageDescription="TO, Flat Index; 3 In-Line, Axial Leads; Body Dia. 4.6mm; Lead Dia. 0.5 mm (max)", PackageReference=E3, PackageVersion=1995/1996, Published=8-Jun-2000, Publisher="Altium Limited"
Q2 Q3: "HEXFET Power MOSFET", ComponentLink1Description="Manufacturer Link", ComponentLink1URL=http://www.irf.com/, ComponentLink2Description=Datasheet, ComponentLink2URL=http://www.irf.com/product-info/datasheets/data/irfz24n.pdf, DatasheetVersion=Sep-1999, LatestRevisionDate=17-Jul-2002, LatestRevisionNote="Re-released for DXP Platform.", Note="Pin 2 is electrically connected to pin 4.", PackageDescription="TO, Thru-Hole, Vertical, Heatsink Mounted; 3 In-Line Leads; Pitch 2.54 mm", PackageReference=TO-220AB, PackageVersion=Feb-1997, Published=8-Jun-2000, Publisher="Altium Limited"
R1 R3 R4 R5 R7 R8 R9 R10 R11 R30 R31 R32 R33 R34 R35 R36 R37 R38 R41 R49 R50 R51 R52 R53 R54 R55 R56 R57 R58 R59 R60 R61 R62 R63 R64 R65 R66 R67 R68 R69 R70 R72 R73 R74 R75 R76 R77 R78 R79 R80 R81 R82 R83 R84 R85 R86 R87 R88 R89 R90 R91 R92 R93 R94 R95 R96 R97 R98 R99 R100 R101 R102 R103 R104 R105 R106 R107 R108 R109 R110 R113 R114 R115: "Resistor", LatestRevisionDate=17-Jul-2002, LatestRevisionNote="Re-released for DXP Platform.", Published=8-Jun-2000, Publisher="Altium Limited"
  R1 R3 R5 R7 R8 R9 R10 R30 R31 R32 R33 R34 R35 R36 R37 R38 R41 R49 R50 R51 R52 R53 R54 R55 R56 R57 R58 R59 R60 R61 R62 R63 R64 R65 R66 R67 R68 R69 R70 R72 R73 R74 R75 R76 R77 R78 R79 R80 R81 R82 R83 R84 R85 R86 R87 R88 R89 R90 R91 R92 R93 R94 R95 R96 R97 R98 R99 R100 R101 R102 R103 R104 R105 R106 R107 R108 R109 R110 R113 R114 R115: PackageDescription="Axial Device, Thru-Hole; 2 Leads; 0.4 in Pin Spacing", PackageReference=AXIAL-0.4
  R4 R11: PackageDescription="Axial Device, Thru-Hole; 2 Leads; 0.3 in Pin Spacing", PackageReference=AXIAL-0.3
R2 R6 RP1 RP2 RP3 RP4 RP5 RP6 RP7: "Preset", VALOR=1K
R71 R112 R116: library part Res2, "Resistor", LatestRevisionDate=17-Jul-2002, LatestRevisionNote="Re-released for DXP Platform.", PackageDescription="Axial Device, Thru-Hole; 2 Leads; 0.4 in Pin Spacing", PackageReference=AXIAL-0.4, Published=8-Jun-2000, Publisher="Altium Limited"
U1 U3: library part Optoisolator1, "4-Pin Phototransistor Optocoupler", DatasheetVersion=Nov-2003, LatestRevisionDate=04-Mar-2005, LatestRevisionNote="Sch pins 3 & 4 Swapped.", PackageReference=DIP-4, Published=24-Mar-1999, Publisher="Altium Limited"
U2 U14 U15 U19 U20 U24: "JFET-Input Operational Amplifier", ComponentLink1Description="Manufacturer Link", ComponentLink1URL=http://www.onsemi.com/site/products/parametrics/0,4446,251,00.html, DatasheetVersion=1988, Published=17-Jul-2002, Publisher="Altium Limited"
  U2 U19: Code_JEDEC=MO-001-AN, LatestRevisionDate=06-Jun-2005, LatestRevisionNote="Stylized 3D Model Added.", PackageDescription="DIP; 8 Leads; Row Spacing 7.62 mm; Pitch 2.54 mm", PackageReference=693-02
  U14 U15 U20 U24: Code_IPC=SOIC127P600-14, LatestRevisionDate=13-Apr-2006, LatestRevisionNote="IPC-7351 Footprint Added.", PackageDescription="14-Pin Small Outline Integrated Circuit 1.27 mm Pitch", PackageReference=751A-02, PackageVersion=1991
U5 U6: library part LM78L12ACZ, "3-Terminal Positive Regulators, 3-pin TO-92", Manufacturer="National Semiconductor", PackageTopMarking=NSXYTT*LM78L*12ACZ, PowerWise=N, Supplier Part Number 1=9490272, Code_JEDEC=TO-226-AA, ComponentLink1Description="LM78L12 Datasheet", ComponentLink1URL=http://www.national.com/ds/LM/LM78L12.pdf, ComponentLink2Description="LM78L12 Web Page", ComponentLink2URL=http://www.national.com/pf/LM/LM78L12.html, ComponentLink3Description="Z03A Package Page", ComponentLink3URL=http://www.national.com/packaging/folders/z03a.html, CompType="LDO IC", DatasheetVersion=Apr-2006, PackageDescription="TO-92, Molded, 3 Lead", PackageReference=Z03A, PackageVersion="revG, Sep-2000", PartNumber=LM78L12ACZ, PinCount=3, Published=4-Dec-2008, Publisher="Altium Limited", RoHS=N, Supplier 1=Farnell
U8: "Operational Amplifier, 8-pin MDIP", Manufacturer="National Semiconductor", PackageTopMarking=NSUZXYTTE#*LM*318N, PowerWise=N, Supplier Part Number 1=398550, Code_JEDEC=MS-001-BA, ComponentLink1Description="LM318 Datasheet", ComponentLink1URL=http://www.national.com/ds/LM/LM318.pdf, ComponentLink2Description="LM318 Web Page", ComponentLink2URL=http://www.national.com/pf/LM/LM318.html, ComponentLink3Description="N08E Package Page", ComponentLink3URL=http://www.national.com/packaging/folders/n08e.html, CompType=Amplifiers, DatasheetVersion=Aug-2000, PackageDescription="MDIP, .365 x .250 x .130in, 8 Lead, .100in Pitch", PackageReference=N08E, PackageVersion="revG, May-2006", PartNumber=LM318N, PinCount=8, Published=4-Dec-2008, Publisher="Altium Limited", RoHS=N, Supplier 1=Farnell
U9: "High and Low Side Driver", ComponentLink1Description="Manufacturer Link", ComponentLink1URL=http://www.irf.com/, ComponentLink2Description=Datasheet, ComponentLink2URL=http://www.irf.com/product-info/datasheets/data/ir2110.pdf, DatasheetVersion=PD60147J, LatestRevisionDate=04-Mar-2005, LatestRevisionNote="Stylized 3D Model Added.", Note="Pins 4, 8 and 14 are not connected", PackageDescription="DIP; 14 Leads; Row Spacing 7.62 mm; Pitch 2.54 mm", PackageReference=PDIP14, Published=8-Jun-2000, Publisher="Altium Limited"
U29: "3-Terminal Positive Voltage Regulators, 3-pin TO-220, Pb-Free", Manufacturer="National Semiconductor", PackageTopMarking=NSUZXYTTE#*LM341T-5.0*LM78M05CT, PowerWise=N, Supplier Part Number 1=LM78M05CT-ND, ComponentLink1Description="LM78M05 Datasheet", ComponentLink1URL=http://www.national.com/ds/LM/LM78M05.pdf, ComponentLink2Description="LM78M05 Web Page", ComponentLink2URL=http://www.national.com/pf/LM/LM78M05.html, ComponentLink3Description="T03B Package Page", ComponentLink3URL=http://www.national.com/packaging/folders/t03b.html, CompType="LDO IC", DatasheetVersion=Aug-2005, PackageDescription="TO-220, Molded, 3 Lead, Straight", PackageReference=T03B, PackageVersion="revL, Jan-1992", PartNumber=LM78M05CT/NOPB, PinCount=3, Published=1-Mar-2010, Publisher="Altium Limited", RoHS=Y, Supplier 1=Digi-Key, Supplier 2=Farnell, Supplier Part Number 2=1685493
D7 D13: VALOR=1N5241B
L1 L2: Code_IEC=1005, Code_JEITA=0402, LatestRevisionDate=29-May-2009, LatestRevisionNote="IPC-7351 Footprint Added.", PackageDescription="Chip Inductor", PackageReference=0402-A, Published=8-Jun-2000, Publisher="Altium Limited"
P6 P7 P10 P11: LatestRevisionDate=17-Jul-2002, LatestRevisionNote="Re-released for DXP Platform.", Publisher="Altium Limited"

## Via types
v1: diameter 50, hole 28, Top Layer to Bottom Layer, 2 vias

## Nets (pads, with @x,y where several pads share a name; then routed paths per layer and width w, separated by ;. In a path a pad name is that pad's centre, name@x,y a point inside that pad or via, vN(x,y) a via of type N, cw(c..) or ccw(c..) an arc to the next point about the centre after c; other vN are vias at no path point)
12V: *.3 *.4 *.10 *.13 *.16 *.21 *.24 ?.1 C27.1 C36.1 C37.2 C47.1 C48.1 C53.1 C54.1 C55.1 C56.1 C65.1 C66.1 C67.1 C68.1 C70.2 C71.2 C73.1 D24.1 Jack1.3 Jack.3 LED3.2 P1.6 P2.2 R8.1 R53.1 R55.1 R57.1 R59.1 R69.1 R70.1 R71.1 R72.1 R75.1 R76.1 R77.1 R79.1 R81.1 R83.1 R93.1 R94.1 R95.1 R96.1 R105.2 R107.2 R115.1 R116.1 RP1.1 RP2.1 RP5.1 RP6.1 U6.1 U9.3 U9.9 U29.2
24V: *1.4 C26.1 C41.1 C70.1 P2.1 R106.1 RP3.2 U2.8 U5.1 U6.3 U8.7 U14.4 U15.4 U19.8 U20.4 U24.4 U29.1
32V: C25.1 C39.1 P8.2 P9.2 U5.3
64V: F3.2 Q2.2 R38.2
A1: *.22 R97.1 U24.1
A2: *.15 R99.1 U24.7
A3: *.12 R101.1 U24.8
A4: *.1 R103.1 U24.14
Bluetooth: C69.2 U19.5
CLK: *.8 P3.4
CS: *.5 P3.3
GND: *1.1 *1.12 ?.8 C25.2 C26.2 C27.2 C36.2 C37.1 C40.1 C41.2 C42.2 C44.2 C74.1 C75.1 F4.1 P2.3 Q3.3 R10.1 R31.1 R37.2 R108.1 RP3.1 RP7.1 RP7.3 U2.4 U5.2 U6.2 U8.4 U9.2 U9.11 U9.13 U14.11 U15.11 U19.4 U20.11 U24.11
"Logic supply": C71.1 P1.3 P1.7 U29.3
Net*1_2: *1.2 U8.2
Net*1_3: *1.3 RP4.2 RP4.3
Net*1_5: *1.5 C43.1
Net*1_6: *1.6 C43.2
Net*1_7: *1.7 RP7.2
Net*1_10: *1.10 C44.1
Net*2_1: *2.1 *3.1 C1.1 D1.1 D3.1 D9.1 | length 3480.3
  Bottom Layer w60: D1.1 2629,3098.59 C1.1@2990.52,2737.07 ; C1.1@2978.43,2718.42 C1.1 3000,2718.42 3000,3200 3400,3600 D9.1 3580,3700 *3.1 ; D9.1@3401.12,3704.29 3390,3715.41 3390,3718.58 3300,3808.58 3300,4390 D3.1 3787.29,4490 3797.29,4500 *2.1
Net*2_2: *2.2 D5.1 P6.1 Q1.3 | length 3043.5
  Bottom Layer w70: D5.1 3609.09,4279.09 3624.47,4279.09 3695.38,4350 *2.2 ; D5.1@3600,4254.62 3600,3977.6 3684.37,3893.23 3684.37,3766.93 3736.3,3715 3736.63,3715 3890,3561.63 3890,3561.3 3900,3551.3 3900,3288.58 3841.42,3230 3660.66,3230 3656.29,3234.37 3523.71,3234.37 3519.34,3230 3360,3230 3280,3150 3280,2940 P6.1 3740,2480 Q1.3
Net*2_3: *2.3 *3.3 C1.2 C6.2 C7.1 C8.1 C13.2 C14.1 C15.1 D1.3 Q1.2 Q4.2 | length 13582.1
  Bottom Layer w40: 3840,2490 4150,2490 C15.1 4364.75,2570 4453.25,2658.5 4468.5,2658.5 C7.1 4491.5,2658.5 4506.75,2658.5 4529.65,2635.6 4614.4,2635.6 4730,2520 5006.57,2520 5030,2543.43 5030,3030 C6.2 ; C6.2@5145.07,3150 4850,3150 4790,3210 4790,3350 4830,3390 5348.99,3390 5530,3208.99 5530,3140.23 5685.6,2984.63 5685.6,2904.4 C13.2 5870,2900 C14.1
  Bottom Layer w60: D1.3 2500,4120 2500,4559.85 2535.15,4595 3033.16,4595 3061.04,4622.88 3172.16,4622.88 3200.04,4595 3849.85,4595 3895,4549.85 3895,4269.35 3815.65,4190 3760,4190 3700,4130 3700,4015.65 3779.37,3936.28 3779.37,3923.34 3800,3902.71 *2.3 3898.46,3801.54 3898.46,3687.52 3985,3600.98 3985,3600.65 3995,3590.65 3995,3249.23 3880.77,3135 3770.65,3135 3705,3069.35 3705,2975 *3.3
  Bottom Layer w70: D1.3 2627.29,3990 2524,3886.71 2524,3060.51 2530,3054.51 2530,2773.15 2735.54,2567.61 C1.2 ; *3.3 3840,2840 3840,2490 Q1.2 3840,2261.01 3881.01,2220 5190,2220 5430,2460 5574.04,2460 5615.05,2418.99 Q4.2 5615.05,2254.95 5656.05,2213.95 5763.95,2213.95 5920,2370 C8.1
Net*2_4: *2.4 D6.1 | length 1376.1
  Top Layer w40: v1(3950,3890) 3960,3890 v1(4130,3720)
  Bottom Layer w40: *2.4 3800,4042.71 3950,3892.71 v1(3950,3890) ; v1(4130,3720) 4190,3660 4290,3560 4560.56,3560 4611.57,3611.01 4797.39,3611.01 4836.39,3650 D6.1
Net*2_5: *2.5 C2.2 C3.2 C4.2 C5.2 C8.2 C10.1 C11.1 C12.1 D7.1 D10.1 L2.2 P4.2 R1.1 R4.1 R6.2 | length 8728.6
  Bottom Layer w40: P4.2 2674.59,4990 2683.83,4980.76 2683.83,4935.17 R1.1@2716.5,4902.5 ; D7.1 4392,3732 R4.1@4510,3732 ; 6155.63,2994.37 6216.5,2933.5 6309.07,2933.5 6410,2832.57 6410,2829.75 ; R6.2 6180.48,2580 R6.2@6184.04,2576.44
  Bottom Layer w70: P4.2@2675,4995 2709.95,5029.95 2749.95,5029.95 2800,5080 D10.1 3158.82,5080 3178.82,5100 C3.2 C5.2 C4.2 4620,4900 C11.1 C10.1@5495.25,4900 ; *2.5 4200,4250 4470,3980 C2.2@4589.79,3980 ; D7.1@4392,3732 4394.37,3734.37 4394.37,3784.58 C2.2@4589.79,3980 ; C10.1 C10.1@5495.25,4900 ; 5562.03,3908.18 5490.21,3980 C2.2 C2.2@4589.79,3980 ; C12.1 C10.1@5495.25,4900 ; 6155.63,2994.37 6155.63,3326.37 L2.2 5720,4004 5720,4610.49 5495.25,4835.25 C10.1@5495.25,4900 ; R6.2@6184.04,2576.44 6353.56,2576.44 C8.2 6410,2620 6410,2829.75
Net*2_6: *2.6 D2.3 | length 250
  Bottom Layer w70: *2.6 D2.3
Net*3_2: *3.2 D11.1 P10.1 Q4.3 | length 4744.6
  Bottom Layer w60: *3.2 3609.37,3520.63 3589.37,3520.63 D11.1 3570.63,3520.63 3516.28,3520.63 3180,3184.35 3180,2730 3825,2085 5270.05,2085 Q4.3 5515.05,2329.19 5520.05,2324.19 5520.05,2215.6 5645.65,2090 5880,2090 P10.1
Net*3_4: *3.4 D12.1 | length 1066
  Bottom Layer w70: *3.4 3985,2845 4655,2845 D12.1
Net*3_5: *3.5 C9.2 C10.2 C11.2 C12.2 C15.2 D13.1 P4.3 R5.1 R11.1 | length 11286.8
  Bottom Layer w40: C15.2 4100,2570 4290,2760 4590,2760 4650,2700 4730,2620 4820,2620 4900,2700 4900,2830 4760,2970 C9.2 ; D13.1 6272,3158 R11.1@6272,3010
  Bottom Layer w60: P4.3 2680,5190 2680,5210 2770,5300 3082.71,5300 3120.07,5262.64 3120.07,5260.93 3163,5218 R5.1 3173.5,5217.5 3225.64,5217.5 3243.14,5200 4560,5200 4660,5100 C11.2 C10.2 C12.2
  Bottom Layer w70: P4.3 2660,5180 2530,5050 2530,4731.01 2571.01,4690 2993.81,4690 3021.69,4717.88 3211.51,4717.88 3220.7,4708.69 3278.69,4708.69 3330,4760 3860,4760 4000,4620 4000,4100 4040,4060 4040,3680.33 4080,3640.33 4080,3640 4100,3620 4100,3438.58 4158.58,3380 4158.99,3380 4200,3338.99 *3.5 4558.33,2971.67 4598.33,2971.67 C9.2 ; C12.2 6100,5100 6194.03,5005.97 6270,4930 D13.1
Net*3_6: *3.6 D8.3 | length 264.1
  Bottom Layer w70: *3.6 4210,3470 D8.3
Net*_6: *.6 R105.1 R106.2
Net*_9: *.9 R107.1 R108.2
Net_2: ?.2 D26.1 R32.2
Net_3: ?.3 ?.5 R30.2 R31.2
Net_4: ?.4 ?.9
Net_6: ?.6 U9.10
Net_7: ?.7 C74.2 D26.2 R32.1
Net_10: ?.10 D27.1 R33.1
Net_11: ?.11 C75.2 D27.2 R33.2
Net_12: ?.12 U9.12
NetC2_1: C2.1 D2.1 L1.1 | length 1357.7
  Bottom Layer w70: D2.1 4590,4440 C2.1 4594.37,4184.37 4729.29,4184.37 4734.22,4189.3 L1.1
NetC3_1: C3.1 C4.1 C5.1 D4.1 L1.2 P4.1 R2.2 | length 6944.4
  Bottom Layer w40: C4.1 4330,4810 4085,4565 4085,4145 4270,3960 4270,3678.99 4318.99,3630 4531.57,3630 4586.5,3684.93 4586.5,3786.5 4680,3880 5470,3880 5493.43,3856.57 5779,3571 5779,3540.13 6010.63,3308.5 6010.63,3239.16 6042.59,3207.2 6042.59,3177.41 R2.2
  Bottom Layer w60: P4.1 2746.76,4790 2751.51,4794.75 2914.85,4794.75 2950,4829.9 D4.1 3115.31,4830 3185.31,4900 C3.1 C5.1 C4.1 ; 4350,4824.06 4350,4790 4535.89,4604.11 5572.48,4604.11 5593.59,4583 L1.2
NetC6_1: C6.1 D6.2 U1.4 | length 463.7
  Bottom Layer w40: D6.2 C6.1 5241.5,3250 5270.47,3221.02 5270.47,3217.06 5333.89,3153.65 5346.35,3153.65 U1.4
NetC7_2: C7.2 R3.1 | length 94.9
  Bottom Layer w40: C7.2 4484.4,2565.6 4569.4,2565.6 R3.1
NetC9_1: C9.1 D8.1 L2.1 | length 1284.9
  Bottom Layer w70: C9.1 4600,3410 4685,3495 4801.6,3495 4811.6,3505 5580.59,3505 5596.29,3489.3 L2.1
NetC13_1: C13.1 D12.2 U3.4 | length 2118.8
  Bottom Layer w40: D12.2 4757.41,2357.41 4784.81,2357.41 4787.39,2360 5160,2360 5330,2530 ; U3.4 5380.99,2580 5330.5,2529.5 5170,2369.01 5170,2900 5220,2950 5306.53,2950 5386.06,2870.47 5500.24,2870.47 5518.27,2888.5 5578.5,2888.5 C13.1
NetC14_2: C14.2 R7.1 | length 342.7
  Bottom Layer w40: R7.1@5707.99,2767 5710.99,2770 5893.7,2770 5961.5,2837.79 5961.5,2865.27 5980,2883.78 C14.2
NetC33_1: C33.1 Jack1.1
NetC33_2: C33.2 R8.2 U2.5
NetC34_1: C34.1 C35.2 D24.2 U9.6
NetC34_2: C34.2 C35.1 C38.1 Q2.3 Q3.2 R35.1 R41.2 U9.5
NetC38_2: C38.2 R38.1
NetC39_2: C39.2 P9.1 R9.1
NetC40_2: C40.2 R41.1
NetC42_1: C42.1 RP3.3 RP4.1
NetC45_1: C45.1 R49.2 R50.1
NetC45_2: C45.2 R51.1 U14.1 U14.2
NetC46_1: C46.1 R51.2 R52.1
NetC46_2: C46.2 U14.6 U14.7 U24.3
NetC47_2: C47.2 R50.2 U14.3
NetC48_2: C48.2 R52.2 U14.5
NetC49_1: C49.1 C53.2 R61.1 R65.2
NetC49_2: C49.2 R69.2 U15.3
NetC50_1: C50.1 C54.2 R62.1 R66.2
NetC50_2: C50.2 R70.2 R115.2 U15.5
NetC51_1: C51.1 C55.2 R63.1 R67.2
NetC51_2: C51.2 R71.2 R116.2 U15.10
NetC52_1: C52.1 C56.2 R64.1 R68.2
NetC52_2: C52.2 R72.2 U15.12
NetC57_1: C57.1 C58.2 R73.1
NetC57_2: C57.2 R49.1 R65.1 R89.1 R104.2 R110.2
NetC58_1: C58.1 R75.2 U14.10
NetC59_1: C59.1 C60.2 R74.1
NetC59_2: C59.2 R73.2 U14.8 U14.9
NetC60_1: C60.1 R76.2 U14.12
NetC61_1: C61.1 C65.2 R85.1 R89.2
NetC61_2: C61.2 R93.2 U20.3
NetC62_1: C62.1 C66.2 R86.1 R90.2
NetC62_2: C62.2 R94.2 U20.5
NetC63_1: C63.1 C67.2 C72.1 C73.2 R87.1 R91.2
NetC63_2: C63.2 C72.2 R95.2 U20.10
NetC64_1: C64.1 C68.2 R88.1 R92.2
NetC64_2: C64.2 R96.2 U20.12
NetC69_1: C69.1 P1.4
NetD1_2: D1.2 P5.1 | length 1432.5
  Bottom Layer w60: D1.2 2625.17,3407.83 2625.17,3421.97 2625,3422.14 2625,3569.85 2660.15,3605 2879.35,3605 2935,3660.65 2935,3739.35 2879.35,3795 2696.42,3795 2661.27,3830.15 2661.27,3879.85 2730,3948.58 2730,4099.29 2660,4169.29 P5.1
NetD1_4: D1.4 NTC1.1 | length 214.1
  Bottom Layer w60: D1.4 2635.41,3710 2645.41,3700 NTC1.1
NetD3_2: D3.2 D5.2 | length 180
  Bottom Layer w60: D3.2 D5.2
NetD4_2: D4.2 R1.2 | length 125.1
  Bottom Layer w40: R1.2 2846,4901.16 2846.5,4901.66 2891.9,4901.66 2899.76,4909.53 2916.39,4909.53 2916.86,4910 2923.24,4910 2943.24,4930 D4.2
NetD7_2: D7.2 R4.2 U1.2 | length 1419.4
  Bottom Layer w40: 4680,3732 4788,3732 D7.2
  Bottom Layer w60: D7.2 4795.07,3730 4814.44,3749.37 5480.35,3749.37 5699,3530.72 5699,3299 U1.2
NetD9_2: D9.2 D11.2 | length 209
  Bottom Layer w60: D9.2 3403.83,3063.83 3508.76,3063.83 3574.93,3130 D11.2
NetD10_2: D10.2 R5.2 | length 105.6
  Bottom Layer w40: D10.2 2964.78,5184.78 3020.78,5184.78 3044,5208 R5.2
NetD13_2: D13.2 R11.2 U3.2 | length 576.6
  Bottom Layer w40: U3.2 6190,2680 D13.2 R11.2@6270,2863.5
NetD23_1: D23.1 Q2.1 R34.2 R35.2
NetD23_2: D23.2 R34.1 U9.7
NetD25_1: D25.1 Q3.1 R36.1 R37.1
NetD25_2: D25.2 R36.2 U9.1
NetF1_1: F1.1 P5.2 | length 708.1
  Bottom Layer w60: P5.2 3045.27,4500 3050.49,4505.22 3118.95,4505.22 3126.6,4512.88 F1.1@3126.6,4276.68
NetF1_2: F1.2 NTC1.2 | length 640.5
  Bottom Layer w60: NTC1.2 2842.71,4000 2863.55,3979.15 2880.85,3979.15 2949.7,3910.3 2949.7,3902.37 3126.6,3725.47 F1.2@3126.6,3489.97
NetF3_1: F3.1 P8.3
NetF4_2: F4.2 P8.1
NetJack_1: Jack.1 U19.3
NetLED3_1: LED3.1 R112.2
NetP1_2: P1.2 R112.1
NetP3_1: P3.1 R97.2 R99.2 R101.2 R103.2
NetP7_1: P7.1 Q1.1 R3.2 U1.3 | length 2488.9
  Bottom Layer w40: Q1.1 4209.5,2330 4313.5,2434 R3.2 4707.61,2434 4712.98,2439.37 5076.57,2439.37 5100,2462.8 5100,2940 5210,3050 5350,3050 P7.1 ; U1.3 5353.31,3246.69 5393.31,3246.69 5460,3180 5460,2982.96 5459.53,2982.49 P7.1@5459.53,2959.53
NetP11_1: P11.1 Q4.1 R7.2 U3.3 | length 719.4
  Bottom Layer w40: P11.1 5390,2650 5420,2680 U3.3 ; U3.3@5555.63,2669.53 5578.9,2669.53 5624.93,2623.5 5706.5,2623.5 5715.05,2614.95 Q4.1
NetR2_1: R2.1 R2.3 U1.1 | length 308.3
  Bottom Layer w60: U1.1 5805.48,3150 5816.11,3160.63 5840.63,3160.63 R2.1 R2.3
NetR6_1: R6.1 R6.3 U3.1 | length 235.6
  Bottom Layer w70: U3.1 R6.1 R6.3@6065.63,2580
NetR9_2: R9.2 R10.2 RP1.2
NetR30_1: R30.1 U8.6
NetR53_2: R53.2 R54.1 U15.2
NetR54_2: R54.2 R61.2 R66.1 U15.1
NetR55_2: R55.2 R56.1 U15.6
NetR56_2: R56.2 R109.1
NetR57_2: R57.2 R58.1 U15.9
NetR58_2: R58.2 R113.1
NetR59_2: R59.2 R60.1 U15.13
NetR60_2: R60.2 R64.2 U15.14 U24.5
NetR62_2: R62.2 R114.1
NetR63_2: R63.2 R68.1 R113.2 U15.8
NetR67_1: R67.1 R109.2 R114.2 U15.7
NetR74_2: R74.2 U14.13 U14.14 U24.12
NetR77_2: R77.2 R78.1 U20.2
NetR78_2: R78.2 R85.2 R90.1 U20.1
NetR79_2: R79.2 R80.1 U20.6
NetR80_2: R80.2 R98.1
NetR81_2: R81.2 R82.1 U20.9
NetR82_2: R82.2 R100.1
NetR83_2: R83.2 R84.1 U20.13
NetR84_2: R84.2 R102.1
NetR86_2: R86.2 R91.1 R98.2 U20.7
NetR87_2: R87.2 R92.1 R100.2 U20.8
NetR88_2: R88.2 R102.2 U20.14 U24.10
NetR104_1: R104.1 RP5.2 U19.1
NetR110_1: R110.1 RP6.2 U19.7
NetRP1_3: RP1.3 U2.2
NetRP2_2: RP2.2 U2.3 U2.7
NetRP2_3: RP2.3 U2.6
NetRP5_3: RP5.3 U19.2
NetRP6_3: RP6.3 U19.6
NetU2_1: U2.1 U8.3
SDI: *.7 P3.2
W1: *.23 U24.2
W2: *.14 U24.6
W3: *.11 U24.9
W4: *.2 U24.13
pads on no net: *1.8 *1.9 *1.11 *1.13 *1.14 *1.15 *1.16 *.17 *.18 *.19 *.20 ?.13 ?.14 ?.15 ?.16 Jack1.2 Jack.2 P1.1 P1.5 U8.1 U8.5 U8.8 U9.4 U9.8 U9.14

## Polygon pours and split planes (outlines as drawn)
Net*3_5 on Bottom Layer "NET*3_5_L02_P008" (solid, pour order 8): 2400,5400 2400,2000 6500,2000 6500,5400
no net on Bottom Layer "NONET_L02_P006" (solid, pour order 6): 2550,4555
no net on Bottom Layer "NONET_L02_P000" (solid, pour order 0): 2530,3695

## Silkscreen, mask and mechanical layers (free items; w line width, h text height)
Top Overlay:
  lines w10: 2010,740 8330,740 8330,6110 2010,6110 2010,740

## Dimensions
2350,5400 to 2350,2000 on Top Overlay
2400,5440 to 6500,5450 on Top Overlay
3845.05,2370 to 5615.05,2330 on Top Overlay

## Text inside footprints (layer, text, board x,y; h text height)
C2: Top Overlay "+" at 4642,4202 h65 r270
C3: Top Overlay "+" at 3308,4878 h65 r90
C4: Top Overlay "+" at 4368,4878 h65 r90
C5: Top Overlay "+" at 3838,4878 h65 r90
C6: Top Overlay "+" at 5187,3261 h40 r270
C7: Top Overlay "+" at 4515,2691 h60 r270
C9: Top Overlay "+" at 4652,3192 h65 r270
C10: Top Overlay "+" at 5428,4878 h65 r90
C11: Top Overlay "+" at 4898,4878 h65 r90
C12: Top Overlay "+" at 5958,4878 h65 r90
C13: Top Overlay "+" at 5579,2937 h40
C14: Top Overlay "+" at 5859,2925 h60
C25: Top Overlay "+" at 8798,10912 h65
C26: Top Overlay "+" at 9358,10912 h65
C27: Top Overlay "+" at 9918,10912 h65
C33: Top Overlay "+" at 10829,1065 h60
C34: Top Overlay "+" at 10659,5235 h60
C36: Top Overlay "+" at 9649,5235 h60
C41: Top Overlay "+" at 10459,11945 h60
C42: Top Overlay "+" at 9619,11945 h60
C43: Top Overlay "+" at 9309,11945 h60
C44: Top Overlay "+" at 8989,11945 h60
C69: Top Overlay "+" at 8729,2045 h60
C70: Top Overlay "+" at 9759,2045 h60
C71: Top Overlay "+" at 10079,2045 h60
D2: Top Overlay "3" at 4469.69,4648.62 h59.06 r180; Top Overlay "1" at 4659.84,4648.62 h59.06 r180
D8: Top Overlay "3" at 4479.69,3618.62 h59.06 r180; Top Overlay "1" at 4669.84,3618.62 h59.06 r180
U5: Top Overlay "2" at 10610.59,10880.32 h59.06 r90; Top Overlay "1" at 10610.59,10790.16 h59.06 r90; Top Overlay "3" at 10610.59,10980.32 h59.06 r90
U6: Top Overlay "2" at 10940.59,10880.32 h59.06 r90; Top Overlay "1" at 10940.59,10790.16 h59.06 r90; Top Overlay "3" at 10940.59,10980.32 h59.06 r90